# Altium PCB Energetski_deo_ploce.PcbDoc (part 1 of 2)
Units mm, origin at the board's own origin, x right, y up, seen from the top; angles counter-clockwise.
Board outline 196.98 x 121.92 mm, 4 copper layers (Energetika, Napajanje 2, Mikroprocesor, Zemlja), stack 1.961 mm thick; 114 components, 87 nets, 356 pads, 23 vias.
Unrouted connection lines stored in the file: 4.
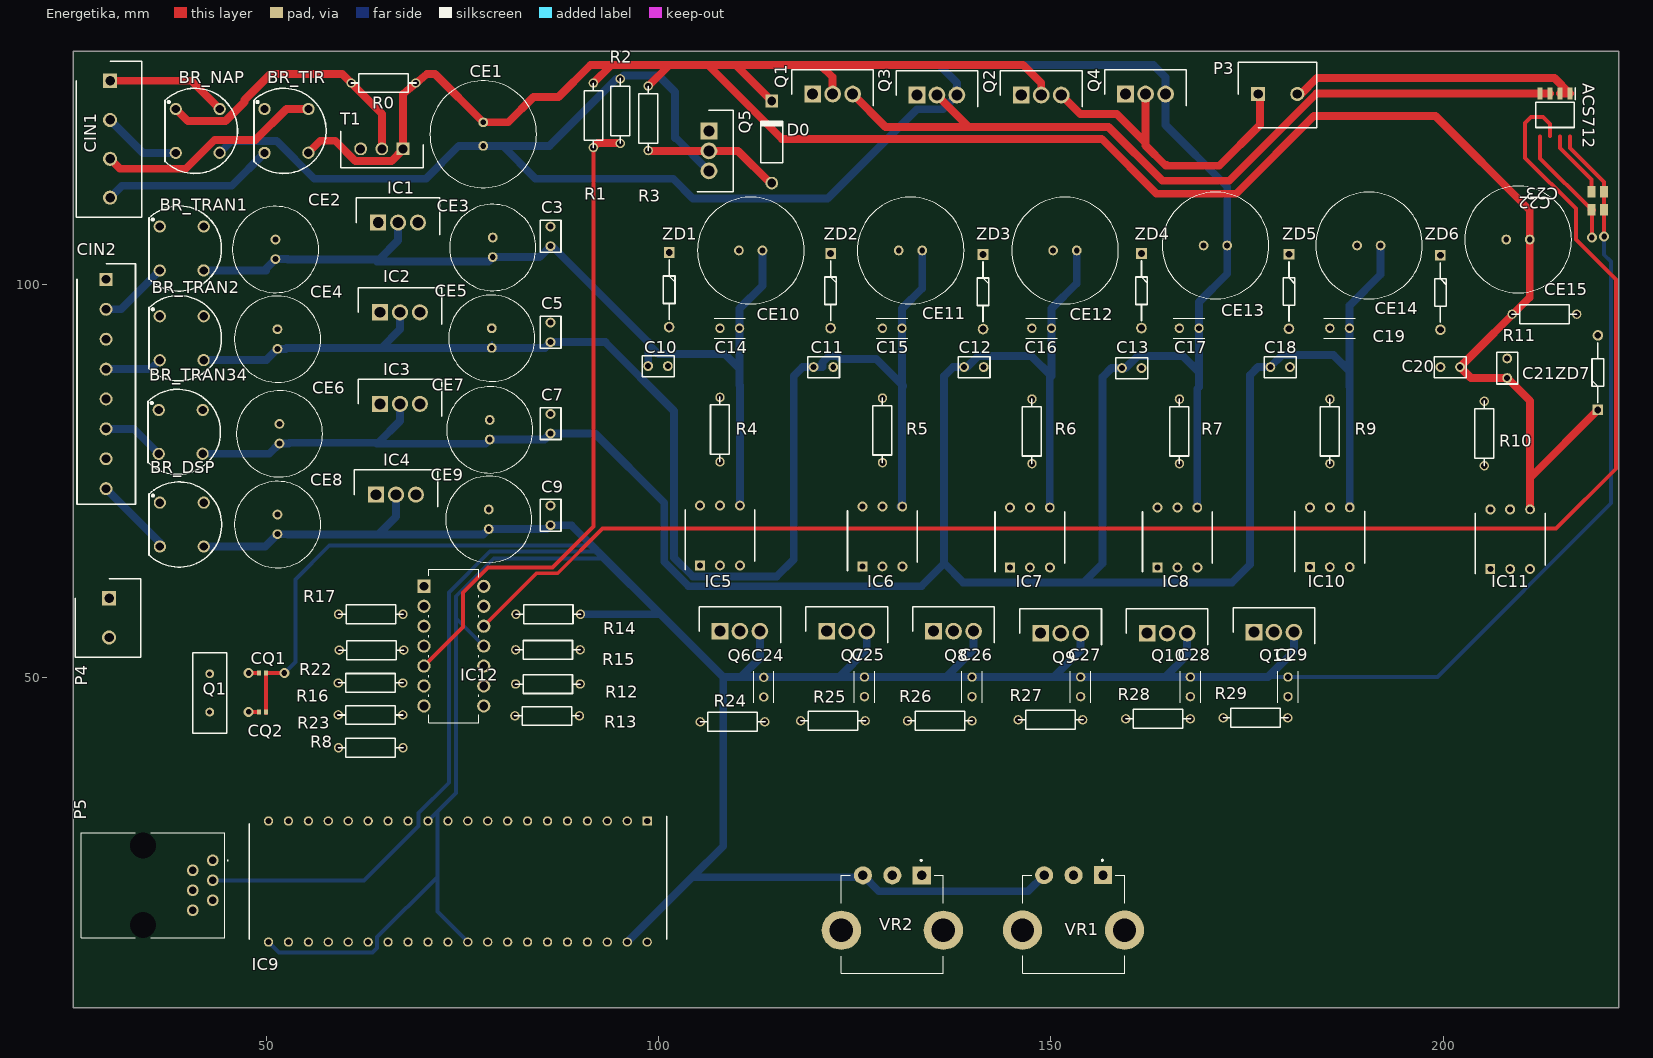
[diagram p0: Energetika view]
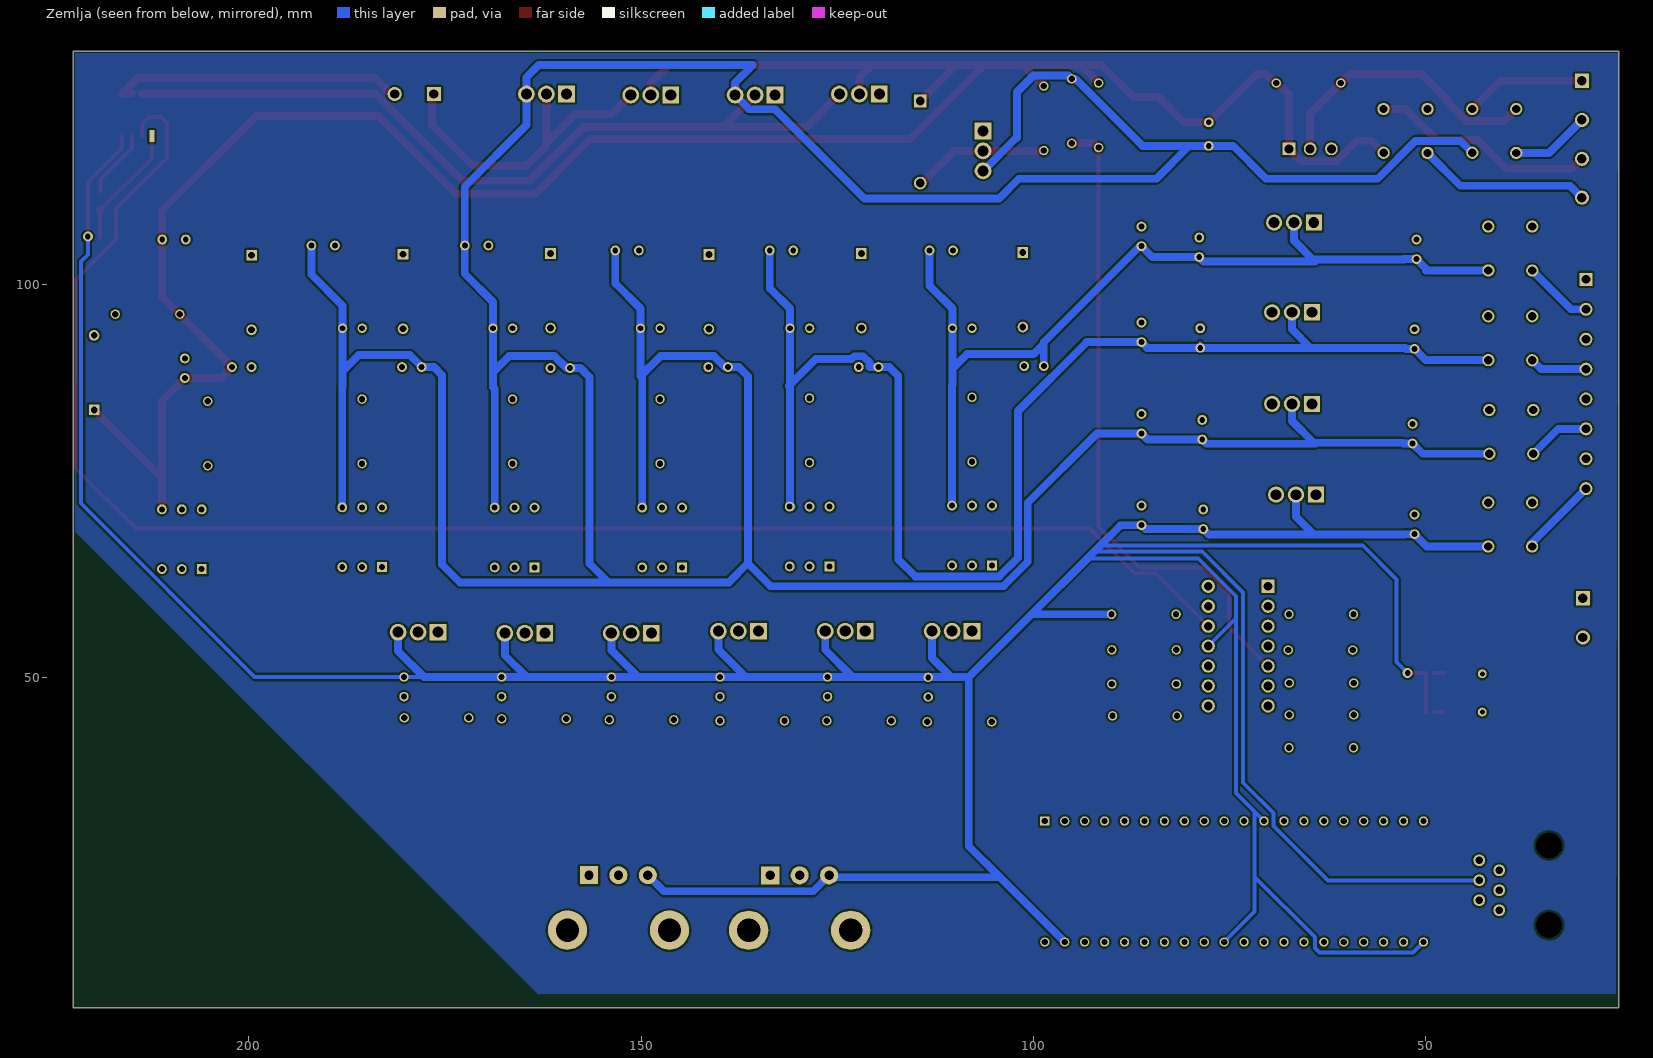
[diagram p1: Zemlja view, seen from below]
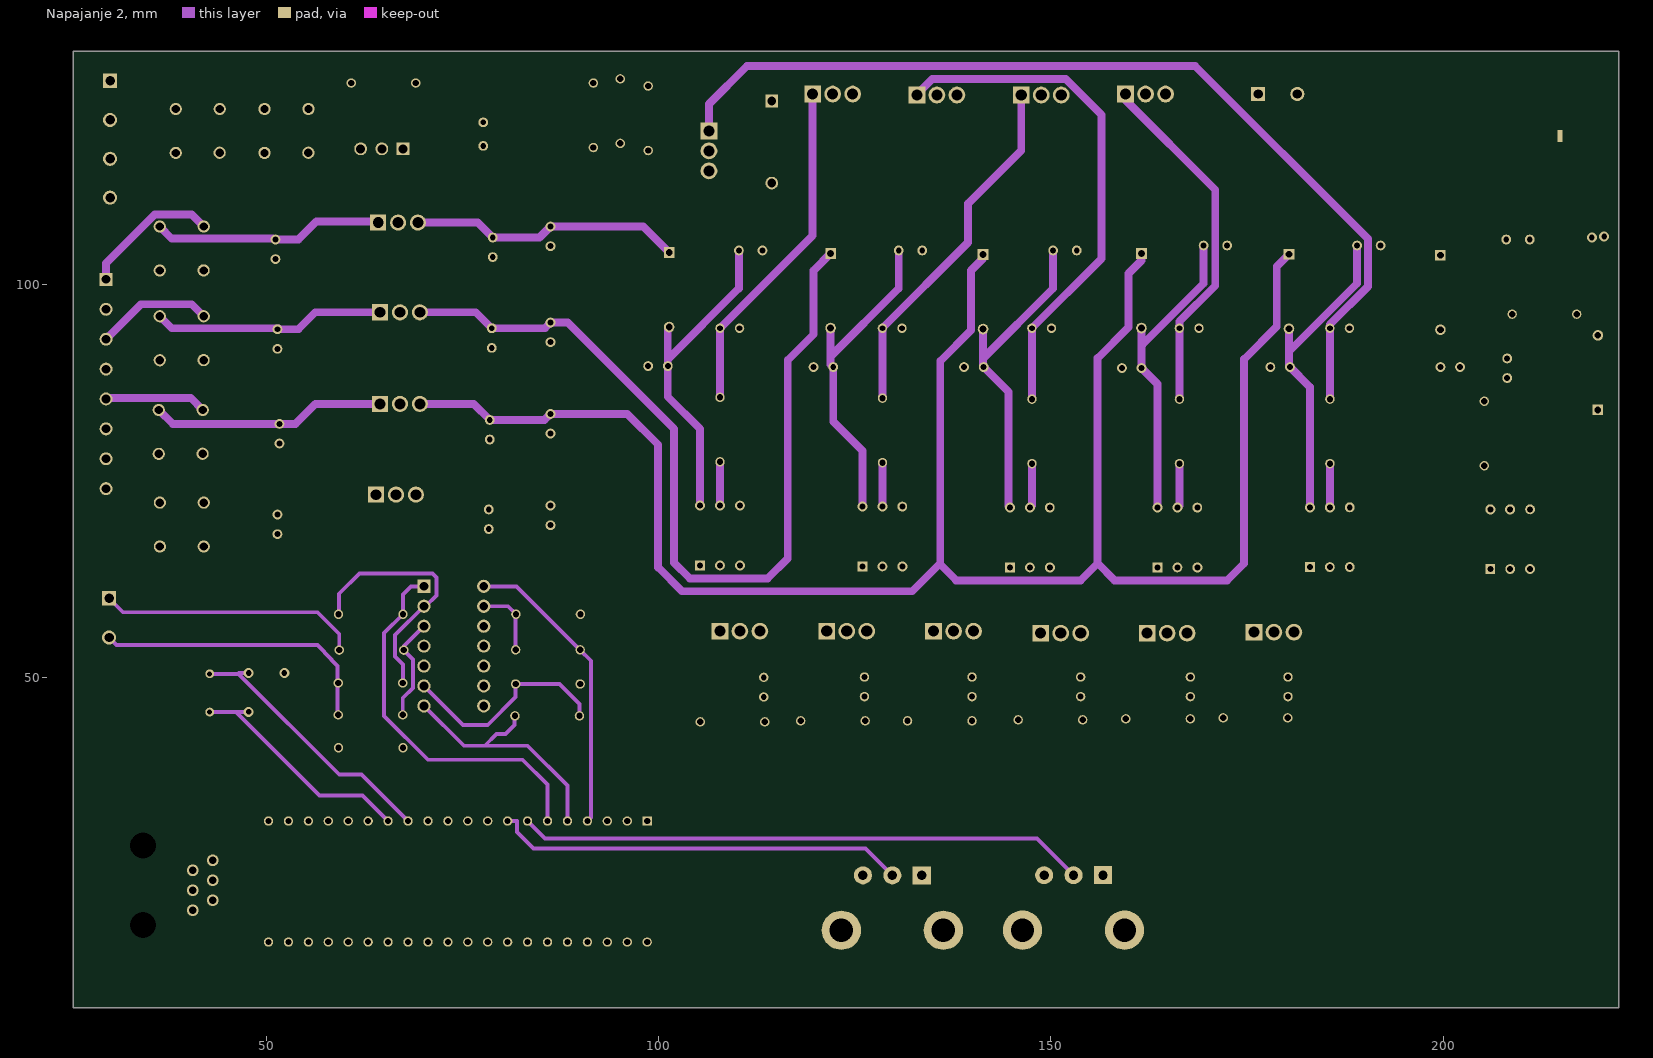
[diagram p2: Napajanje 2]
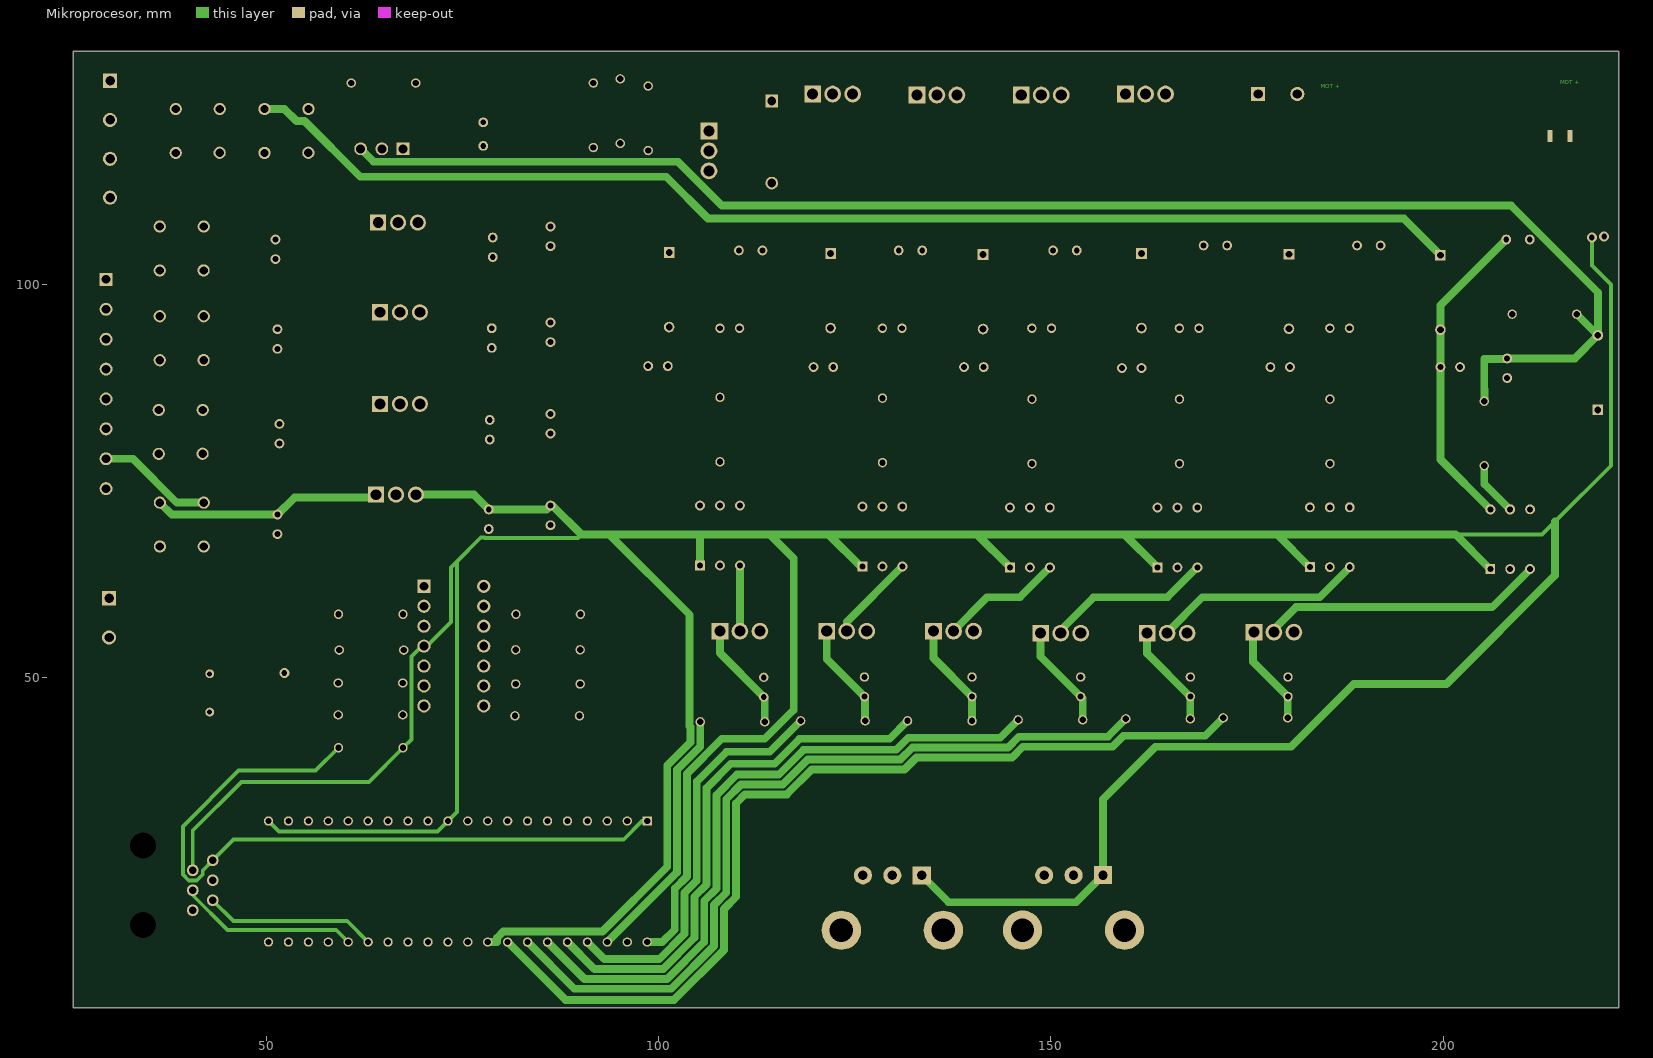
[diagram p3: Mikroprocesor]

## Layer stack, top to bottom
Top Solder: solder mask 0.0102, Solder Resist, Dk 3.5
Energetika: signal copper 0.0356
Dielectric 1: core 0.254, FR-4, Dk 4.2
Napajanje 2: signal copper 0.036
Dielectric 3: prepreg 0.127, Dk 4.2
Mikroprocesor: signal copper 1
Dielectric 2: core 0.254, Dk 4.2
Zemlja: signal copper 0.254
Bottom Solder: solder mask 0.0102, Solder Resist, Dk 3.5

## Board outline
25.4,129.794 25.4,7.874 222.377,7.874 222.377,129.794

## Design rules (kind name [scope] priority, off if disabled: settings)
Clearance [All] p1: gap=0.254 ignorepadtopadclearanceinfootprint=FALSE except(0: Arc-Hole Track-Hole SMDPad-Hole THPad-Hole Via-Hole Fill-Hole Poly-Hole Region-Hole Text-Hole)
PlaneClearance [All] p1: clearance=1
PolygonConnect [InNet('GND')] p1: connectstyle=Relief reliefconductorwidth=1 reliefentries=4 polygonreliefangle="90 Angle" airgapwidth=1
RoutingVias [All] p1: holewidth=0.711 width=1.27 viastyle="Through Hole" minholewidth=0.711 minwidth=1 maxholewidth=0.711 maxwidth=1.27
SolderMaskExpansion [All] p1: expansion=0.102
Width [All] p1: maxlimit=2 minlimit=0.254 preferedwidth=1 minimp=50.000000 maximp=50.000000 favimp=50.000000
29 further rules are at their usual default settings.

## Classes and differential pairs
component class "Upravljacki deo": ACS712 C10 C11 C12 C13 C14 C15 C16 C17 C18 C19 C20 C21 C22 C23 C24 C25 C26 C27 C28 C29 CE10 CE11 CE12 CE13 CE14 CE15 CQ1 CQ2 IC5 IC6 IC7 IC8 IC9 IC10 IC11 IC12 P3 P4 P5 Q1 Q6 Q7 Q8 Q9 Q10 Q11 R4 R5 R6 R7 R8 R9 R10 R11 R12 R13 R14 R15 R16 R17 R22 R23 R24 R25 R26 R27 R28 R29 VR1 VR2 ZD1 ZD2 ZD3 ZD4 ZD5 ZD6 ZD7
component class Napajanje_1: BR_DSP BR_NAP BR_TIR BR_TRAN1 BR_TRAN2 BR_TRAN34 C3 C5 C7 C9 CE1 CE2 CE3 CE4 CE5 CE6 CE7 CE8 CE9 CIN1 CIN2 D0 IC1 IC2 IC3 IC4 Q1 Q2 Q3 Q4 Q5 R0 R1 R2 R3 T1

## Components (designator, comment, footprint, x,y, rotation, side; value= is the part's Value field where it differs from the comment)
ACS712 "Current sensor" SOIC127P600X175-8N 214.249,121.666 r270 top
BR_DSP "W04G-E4/51GI-ND" "BRIGE RECTIFIER" 36.449,72.263 r270 top
BR_NAP "W04G-E4/51GI-ND" "BRIGE RECTIFIER" 38.481,122.428 r270 top
BR_TIR "W04G-E4/51GI-ND" "BRIGE RECTIFIER" 49.784,122.428 r270 top
BR_TRAN1 "W04G-E4/51GI-ND" "BRIGE RECTIFIER" 36.437,107.442 r270 top
BR_TRAN2 "W04G-E4/51GI-ND" "BRIGE RECTIFIER" 36.437,96.012 r270 top
BR_TRAN34 "W04G-E4/51GI-ND" "BRIGE RECTIFIER" 36.31,84.074 r270 top
C3 "BC1160TR-ND" "CAP4, 0.1uF, 50V" 86.233,104.942 r90 top value=0.1uF
C5 "BC1160TR-ND" "CAP4, 0.1uF, 50V" 86.233,92.71 r90 top value=0.1uF
C7 "BC1160TR-ND" "CAP4, 0.1uF, 50V" 86.233,81.066 r90 top value=0.1uF
C9 "BC1160TR-ND" "CAP4, 0.1uF, 50V" 86.233,69.382 r90 top value=0.1uF
C10 "BC1160TR-ND" "CAP4, 0.1uF, 50V" 98.679,89.662 r0 top value=0.1uF
C11 "BC1160TR-ND" "CAP4, 0.1uF, 50V" 119.761,89.535 r0 top value=0.1uF
C12 "BC1160TR-ND" "CAP4, 0.1uF, 50V" 138.938,89.535 r0 top value=0.1uF
C13 "BC1160TR-ND" "CAP4, 0.1uF, 50V" 159.044,89.408 r0 top value=0.1uF
C14 "BC5223TB-ND" "CAP6, 100pF, 50V" 107.823,94.488 r0 top value=100pF
C15 "BC5223TB-ND" "CAP6, 100pF, 50V" 128.524,94.488 r0 top value=100pF
C16 "BC5223TB-ND" "CAP6, 100pF, 50V" 147.574,94.488 r0 top value=100pF
C17 "BC5223TB-ND" "CAP6, 100pF, 50V" 166.37,94.488 r0 top value=100pF
C18 "BC1160TR-ND" "CAP4, 0.1uF, 50V" 177.967,89.535 r0 top value=0.1uF
C19 "BC5223TB-ND" "CAP6, 100pF, 50V" 185.547,94.488 r0 top value=100pF
C20 "BC1160TR-ND" "CAP4, 0.1uF, 50V" 202.144,89.535 r180 top value=0.1uF
C21 "BC1160TR-ND" "CAP4, 0.1uF, 50V" 208.153,88.138 r90 top value=0.1uF
C22 "C0805C104K9RACTU" "CAP10, 0.1uF, 6.4V" 219.71,109.601 r0 top
C23 "C1206Y102K9RAC7800" "CAP9, 1000pF, 6.3V" 219.71,111.887 r0 top
C24 "BC5223TB-ND" "CAP6, 100pF, 50V" 113.411,47.498 r90 top value=100pF
C25 "BC5223TB-ND" "CAP6, 100pF, 50V" 126.238,47.538 r90 top value=100pF
C26 "BC5223TB-ND" "CAP6, 100pF, 50V" 139.954,47.538 r90 top value=100pF
C27 "BC5223TB-ND" "CAP6, 100pF, 50V" 153.797,47.538 r90 top value=100pF
C28 "BC5223TB-ND" "CAP6, 100pF, 50V" 167.767,47.538 r90 top value=100pF
C29 "BC5223TB-ND" "CAP6, 100pF, 50V" 180.213,47.538 r90 top value=100pF
CE1 "399-6104-ND" "CAP2 100uF, 35V - duplicate" 77.66,120.729 r270 top value=100uF
CE2 "399-6575-ND" "CAP1 33uF, 35V" 51.181,105.791 r270 top value=33µF
CE3 "399-6575-ND" "CAP1 33uF, 35V" 78.867,106.045 r270 top value=33µF
CE4 "399-6575-ND" "CAP1 33uF, 35V" 51.435,94.361 r270 top value=33µF
CE5 "399-6575-ND" "CAP1 33uF, 35V" 78.74,94.488 r270 top value=33µF
CE6 "399-6575-ND" "CAP1 33uF, 35V" 51.689,82.296 r270 top value=33µF
CE7 "399-6575-ND" "CAP1 33uF, 35V" 78.486,82.804 r270 top value=33µF
CE8 "399-6575-ND" "CAP1 33uF, 35V" 51.435,70.739 r270 top value=33µF
CE9 "399-6575-ND" "CAP1 33uF, 35V" 78.359,71.394 r270 top value=33µF
CE10 "TE1157-E3-ND" "CAP8, 20uF, 16V" 110.236,104.394 r0 top value=20µF
CE11 "TE1157-E3-ND" "CAP8, 20uF, 16V" 130.604,104.394 r0 top value=20µF
CE12 "TE1157-E3-ND" "CAP8, 20uF, 16V" 150.289,104.394 r0 top value=20µF
CE13 "TE1157-E3-ND" "CAP8, 20uF, 16V" 169.466,105.029 r0 top value=20µF
CE14 "TE1157-E3-ND" "CAP8, 20uF, 16V" 189.024,105.029 r0 top value=20µF
CE15 "TE1157-E3-ND" "CAP8, 20uF, 16V" 208.026,105.791 r0 top value=20µF
CIN1 "Header" "HEADER 4 PIN" 30.099,126.031 r270 top
CIN2 "" "HEADER 8 PIN" 29.591,100.711 r270 top
CQ1 "22p" CAPC1005X56N 49.53,50.546 r180 top
CQ2 "22p" CAPC1005X56N 49.53,45.593 r180 top
D0 "UF4007TR-ND" "DIODE, 1000V, 1A" 114.427,112.984 r90 top
IC1 "512-LM7812ACT" "LM7812ACT, 1A" 64.267,107.95 r0 top
IC2 "512-LM7812ACT" "LM7812ACT, 1A" 64.516,96.52 r0 top
IC3 "512-LM7812ACT" "LM7812ACT, 1A" 64.516,84.836 r0 top
IC4 "LM7805ACT" "LM7805ACT, 1A" 64.008,73.279 r0 top
IC5 "TLP701H(TP,F)" "OPTOISO, 30V, 60mA" 105.283,64.262 r90 top
IC6 "TLP701H(TP,F)" "OPTOISO, 30V, 60mA" 125.984,64.135 r90 top
IC7 "TLP701H(TP,F)" "OPTOISO, 30V, 60mA" 144.78,64.008 r90 top
IC8 "TLP701H(TP,F)" "OPTOISO, 30V, 60mA" 163.576,64.008 r90 top
IC9 "DSPIC30F4011-30I/P" DIP1543W58P254L5175H635Q40N 74.422,23.971 r270 top
IC10 "TLP701H(TP,F)" "OPTOISO, 30V, 60mA" 183.007,64.041 r90 top
IC11 "TLP701H(TP,F)" "OPTOISO, 30V, 60mA" 205.994,63.787 r90 top
IC12 "*" 4xOPAMP_DIP254P762X508-14 77.724,46.355 r0 top
P3 "Connector 2" "HEADER 2 PIN" 176.403,124.333 r0 top
P4 "Connector 2" "HEADER 2 PIN" 29.972,60.071 r270 top
P5 "MPLAB_con" "MPLAB CONNECTOR" 34.29,23.495 r270 top
Q1 "*" HC-49-4H 42.799,48.006 r90 top
Q1 "STP7NK40ZFP" "MOSFET 400V, 5.4A" 119.634,124.333 r0 top
Q2 "STP7NK40ZFP" "MOSFET 400V, 5.4A" 146.219,124.206 r0 top
Q3 "STP7NK40ZFP" "MOSFET 400V, 5.4A" 132.927,124.206 r0 top
Q4 "STP7NK40ZFP" "MOSFET 400V, 5.4A" 159.512,124.333 r0 top
Q5 "STP7NK40ZFP" "MOSFET 400V, 5.4A" 106.426,119.634 r270 top
Q6 "STP7NK40ZFP" "MOSFET 400V, 5.4A" 107.823,55.88 r0 top
Q7 "STP7NK40ZFP" "MOSFET 400V, 5.4A" 121.433,55.88 r0 top
Q8 "STP7NK40ZFP" "MOSFET 400V, 5.4A" 135.044,55.88 r0 top
Q9 "STP7NK40ZFP" "MOSFET 400V, 5.4A" 148.697,55.626 r0 top
Q10 "STP7NK40ZFP" "MOSFET 400V, 5.4A" 162.265,55.626 r0 top
Q11 "STP7NK40ZFP" "MOSFET 400V, 5.4A" 175.875,55.753 r0 top
R0 "140XBK-ND" "RES5, 140R, 0.25W - duplicate" 72.907,125.741 r180 top value=140R
R1 "270QBK-ND" "RES2, 2K4, 0.25W - duplicate" 91.705,113.656 r90 top value=2K4
R2 "270QBK-ND" "RES1, 240R, 0.25W" 95.112,130.116 r270 top value=240R
R3 "270QBK-ND" "RES2, 2K4, 0.25W - duplicate" 98.69,113.275 r90 top value=2K4
R4 "47QBK-ND" "RES3, 47R, 0.25W - duplicate" 107.823,89.535 r270 top value="47 Ohm"
R5 "47QBK-ND" "RES3, 47R, 0.25W - duplicate" 128.524,89.433 r270 top value="47 Ohm"
R6 "47QBK-ND" "RES3, 47R, 0.25W - duplicate" 147.574,89.306 r270 top value="47 Ohm"
R7 "47QBK-ND" "RES3, 47R, 0.25W - duplicate" 166.37,89.306 r270 top value="47 Ohm"
R8 "47KQTR-ND" "RES3, 47R, 0.25W - duplicate" 55.363,41.01 r0 top value=47K
R9 "47QBK-ND" "RES3, 47R, 0.25W - duplicate" 185.547,89.306 r270 top value="47 Ohm"
R10 "470QTR-ND" "RES3, 47R, 0.25W - duplicate" 205.221,89.036 r270 top
R11 "CFR-25JR-52-3K3" "RES6, 3K3, 0.25W - duplicate" 204.932,96.266 r0 top value=3k3
R12 "CFR-25JR-52-10K" "RES4, 10K, 0.25W - duplicate" 77.935,49.138 r0 top
R13 "CFR-25JR-52-10K" "RES4, 10K, 0.25W - duplicate" 77.842,45.074 r0 top
R14 "CFR-25JR-52-10K" "RES4, 10K, 0.25W - duplicate" 93.896,58.05 r180 top
R15 "CFR-25JR-52-10K" "RES4, 10K, 0.25W - duplicate" 77.935,53.49 r0 top
R16 "CFR-25JR-52-10K" "RES4, 10K, 0.25W - duplicate" 71.256,49.287 r180 top
R17 "CFR-25JR-52-10K" "RES4, 10K, 0.25W - duplicate" 71.29,58.05 r180 top
R22 "24KQBK-ND" "RES2, 2K4, 0.25W - duplicate" 55.456,53.456 r0 top
R23 "2.4KQBK-ND" "RES1, 240R, 0.25W" 55.329,45.201 r0 top
R24 "47QBK-ND" "RES3, 47R, 0.25W - duplicate" 117.391,44.334 r180 top value="47 Ohm"
R25 "47QBK-ND" "RES3, 47R, 0.25W - duplicate" 130.184,44.461 r180 top value="47 Ohm"
R26 "47QBK-ND" "RES3, 47R, 0.25W - duplicate" 143.807,44.461 r180 top value="47 Ohm"
R27 "47QBK-ND" "RES3, 47R, 0.25W - duplicate" 157.904,44.588 r180 top value="47 Ohm"
R28 "47QBK-ND" "RES3, 47R, 0.25W - duplicate" 171.62,44.715 r180 top value="47 Ohm"
R29 "47QBK-ND" "RES3, 47R, 0.25W - duplicate" 184.032,44.842 r180 top value="47 Ohm"
T1 "Thyristor1" "THYRISTOR 400V, 8A" 67.437,117.348 r180 top
VR1 "PTV09A-1220F-B103" PTV09A1220FB103 152.885,24.78 r180 top
VR2 "PTV09A-1220F-B103" PTV09A1220FB103 129.794,24.765 r180 top
ZD1 "BZX55C12-TAPGICT-ND" "ZENER DIODE, 12V, 200mA, 500mW" 101.346,104.14 r270 top
ZD2 "BZX55C12-TAPGICT-ND" "ZENER DIODE, 12V, 200mA, 500mW" 121.92,104.013 r270 top
ZD3 "BZX55C12-TAPGICT-ND" "ZENER DIODE, 12V, 200mA, 500mW" 141.351,103.886 r270 top
ZD4 "BZX55C12-TAPGICT-ND" "ZENER DIODE, 12V, 200mA, 500mW" 161.544,104.013 r270 top
ZD5 "BZX55C12-TAPGICT-ND" "ZENER DIODE, 12V, 200mA, 500mW" 180.34,103.919 r270 top
ZD6 "BZX55C12-TAPGICT-ND" "ZENER DIODE, 12V, 200mA, 500mW" 199.644,103.792 r270 top
ZD7 "BZX55C12-TAPGICT-ND" "ZENER DIODE, 12V, 200mA, 500mW" 219.71,84.074 r90 top

## Footprints (in the part's own frame and the unit in brackets; to place one, negate y for a bottom-side part, rotate by r counter-clockwise, add the part's x,y. Pads: shape width x height; smd on the part's side, far side on the other; paste and mask are expansions set on the pad)
4xOPAMP_DIP254P762X508-14 [mil]
  rect 66x66 hole 44: 1(-300,600)
  round 66 hole 44: 2(-300,500) 3(-300,400) 4(-300,300) 5(-300,200) 6(-300,100) 7(-300,0) 8(0,0) 9(0,100) 10(0,200) 11(0,300) 12(0,400) 13(0,500) 14(0,600)
  silkscreen extent -275,-85 -25,685
"BRIGE RECTIFIER" [mm] "Max dia = 0.81mm"
  oval 1.56x1.55 hole 1.06: 1(0,0)
  round 1.56 hole 1.06: 2(5.6,0) 3(5.588,5.588) 4(0,5.6)
  silkscreen extent -2.63,-1.37 8.22,7.86
"CAP1 33uF, 35V" [mm] "Thru-Hole;"
  round 1.25 hole 0.75: 1(0,0) 2(2.5,0)
  silkscreen extent -4.23,-5.5 6.77,5.5
"CAP2 100uF, 35V - duplicate" [mm] "Thru-Hole;"
  round 1.25 hole 0.75: 1(0,0) 2(3,0)
  silkscreen extent -5.27,-6.8 8.32,6.8
"CAP4, 0.1uF, 50V" [mm] "Radial Cap, Thru-Hole; 2 Leads; 0.3 in Pin Spacing"
  round 1.258 hole 0.758: 1(0,0) 2(2.5,0)
  silkscreen extent -0.76,-1.33 3.3,1.33
"CAP6, 100pF, 50V" [mm]
  round 1.2 hole 0.75: 1(0,0) 2(2.5,0)
  silkscreen extent -0.75,-1.3 3.25,1.3, body extent -0.75,-1.3 3.25,1.3, height 5.7
"CAP8, 20uF, 16V" [mm] "Thru-Hole;"
  round 1.25 hole 0.75: 1(0,0) 2(3,0)
  silkscreen extent -5.28,-6.8 8.32,6.8
"CAP9, 1000pF, 6.3V" [mm]
  rect 1.02x1.47 smd: 1(-0.8,0) 2(0.8,0)
  body extent -1,-0.63 1,0.63, height 0.88
"CAP10, 0.1uF, 6.4V" [mm]
  rect 1.02x1.47 smd: 1(-0.8,0) 2(0.8,0)
  body extent -1,-0.63 1,0.63, height 0.88
CAPC1005X56N [mm]
  rect 0.5x0.65 smd: 1(-0.45,0) 2(0.45,0)
  body extent -0.5,-0.25 0.5,0.25, height 0.56
"DIODE, 1000V, 1A" [mm] "Through Hole"
  round 1.61 hole 1.11: 1(0,0)
  rect 1.61x1.61 hole 1.11: 2(10.46,0)
  silkscreen extent 2.58,-1.4 7.99,1.4
DIP1543W58P254L5175H635Q40N [mm]
  rect 1.184x1.184 hole 0.784: 1(-7.715,24.13)
  round 1.184 hole 0.784: 2(-7.715,21.59) 3(-7.715,19.05) 4(-7.715,16.51) 5(-7.715,13.97) 6(-7.715,11.43) 7(-7.715,8.89) 8(-7.715,6.35) 9(-7.715,3.81) 10(-7.715,1.27) 11(-7.715,-1.27) 12(-7.715,-3.81) 13(-7.715,-6.35) 14(-7.715,-8.89) 15(-7.715,-11.43) 16(-7.715,-13.97) 17(-7.715,-16.51) 18(-7.715,-19.05) 19(-7.715,-21.59) 20(-7.715,-24.13) 21(7.715,-24.13) 22(7.715,-21.59) 23(7.715,-19.05) 24(7.715,-16.51) 25(7.715,-13.97) 26(7.715,-11.43) 27(7.715,-8.89) 28(7.715,-6.35) 29(7.715,-3.81) 30(7.715,-1.27) 31(7.715,1.27) 32(7.715,3.81) 33(7.715,6.35) 34(7.715,8.89) 35(7.715,11.43) 36(7.715,13.97) 37(7.715,16.51) 38(7.715,19.05) 39(7.715,21.59) 40(7.715,24.13)
  silkscreen extent -8.31,-26.61 7.37,26.61, body extent -7.86,-25.88 7.86,25.88, height 6.35
HC-49-4H [mm]
  round 1.13 hole 0.63: 1(-2.44,0) 2(2.44,0)
  silkscreen extent -5.13,-2.17 5.13,2.17
"HEADER 2 PIN" [mm]
  rect 1.8x1.8 hole 1.2: 1(0,0)
  round 1.8 hole 1.2: 2(5,0)
  silkscreen extent -2.5,-4.3 7.5,4.05
"HEADER 4 PIN" [mm]
  rect 1.8x1.8 hole 1.2: 1(0,0)
  round 1.8 hole 1.2: 2(5,0) 3(9.953,0) 4(14.906,0)
  silkscreen extent -2.5,-4.32 17.41,4.05
"HEADER 8 PIN" [mm]
  rect 1.65x1.65 hole 1.1: 1(0,0)
  round 1.65 hole 1.1: 2(3.81,0) 3(7.62,0) 4(11.43,0) 5(15.24,0) 6(19.05,0) 7(22.86,0) 8(26.67,0)
  silkscreen extent -2,-3.7 28.67,3.75
"LM7805ACT, 1A" [mm]
  rect 2.055x2.055 hole 1.37: 1(0,0)
  round 2.055 hole 1.37: 2(2.535,0) 3(5.07,0)
  silkscreen extent -2.8,-1.55 7.87,3.15, body extent -2.55,-1.55 7.61,3.15, height 18.54
"LM7812ACT, 1A" [mm]
  rect 2.055x2.055 hole 1.37: 1(0,0)
  round 2.055 hole 1.37: 2(2.535,0) 3(5.07,0)
  silkscreen extent -2.8,-1.55 7.87,3.15, body extent -2.55,-1.55 7.61,3.15, height 18.54
"MOSFET 400V, 5.4A" [mm]
  rect 2.13x2.13 hole 1.42: 1(0,0)
  round 2.13 hole 1.42: 2(2.55,0) 3(5.1,0)
  silkscreen extent -2.65,-1.5 7.75,3.1, body extent -2.55,-1.5 7.65,3.1, height 19.4
"MPLAB CONNECTOR" [mm]
  round 1.493 hole 0.96: 1(-3.175,8.89) 2(-1.905,6.35) 3(-0.635,8.89) 4(0.635,6.35) 5(1.905,8.89) 6(3.175,6.35)
  round 1.665 hole 3.33 unplated: 7(-5.08,0) 8(5.08,0)
  silkscreen extent -6.71,-7.87 6.71,10.85, body extent -6.71,-7.87 6.71,10.42, height 12.1
"OPTOISO, 30V, 60mA" [mm]
  rect 1.26x1.26 hole 0.76: 1(0,0)
  round 1.26 hole 0.76: 2(0,-2.54) 3(0,-5.08) 4(7.62,-5.08) 5(7.62,-2.54) 6(7.62,0)
  silkscreen extent -0.56,-6.98 7.11,1.91, body extent -0.13,-6.8 7.75,1.72, height 5.08
PTV09A1220FB103 [mm]
  rect 2.3x2.3 hole 1.2: 1(-3.75,0)
  round 2.3 hole 1.2: 2(0,0) 3(3.75,0)
  round 5 hole 2.973: MH1(-6.5,7) MH2(6.5,7)
  silkscreen extent -6.5,-2 6.5,12.5
"RES1, 240R, 0.25W" [mm]
  round 1.2 hole 0.8: 1(3.853,0.011) 2(12.074,0.011)
  silkscreen extent 3.8,-1.2 12.07,1.2
"RES2, 2K4, 0.25W - duplicate" [mm]
  round 1.2 hole 0.8: 1(3.853,0.011) 2(12.074,0.011)
  silkscreen extent 3.8,-1.2 12.07,1.2
"RES3, 47R, 0.25W - duplicate" [mm]
  round 1.2 hole 0.8: 1(3.853,0.011) 2(12.074,0.011)
  silkscreen extent 3.8,-1.2 12.07,1.2
"RES4, 10K, 0.25W - duplicate" [mm]
  round 1.2 hole 0.8: 1(3.853,0.011) 2(12.074,0.011)
  silkscreen extent 3.8,-1.2 12.07,1.2
"RES5, 140R, 0.25W - duplicate" [mm]
  round 1.2 hole 0.8: 1(3.853,0.011) 2(12.074,0.011)
  silkscreen extent 3.8,-1.2 12.07,1.2
"RES6, 3K3, 0.25W - duplicate" [mm]
  round 1.2 hole 0.8: 1(3.853,0.011) 2(12.074,0.011)
  silkscreen extent 3.8,-1.2 12.07,1.2
SOIC127P600X175-8N [mm]
  rect 1.525x0.65 smd: 1(-2.712,1.905) 2(-2.712,0.635) 3(-2.712,-0.635) 4(-2.712,-1.905)
  rect 1.525x0.65 smd far side: 5(2.712,-1.905)
  rect 1.525x0.65 on Mid2: 6(2.712,-0.635) 8(2.712,1.905)
  rect 1.525x0.65 on Mid1: 7(2.712,0.635)
  silkscreen extent -3.47,-2.45 1.6,2.58, body extent -3,-2.45 3,2.45, height 1.75
"THYRISTOR 400V, 8A" [mm]
  rect 1.63x1.63 hole 1.13: 1(0,0)
  round 1.63 hole 1.13: 2(2.7,0) 3(5.4,0)
  silkscreen extent -2.59,-2.24 7.92,2.41, body extent -2.49,-2.24 7.82,2.41, height 18.67
"ZENER DIODE, 12V, 200mA, 500mW" [mm]
  rect 1.35x1.35 hole 0.85: 1(0,0)
  round 1.35 hole 0.85: 2(9.5,0)
  silkscreen extent 0.95,-0.75 8.55,0.75, body extent -0.3,-0.85 9.8,0.85, height 1.69

## Part data
ACS712: "ACS712ELCTR-05B-T", Manufacturer_Name="Allegro Microsystems", RS Part Number=6807131P, Allied_Number=R1076681, Allied Price/Stock=http://www.alliedelec.com/allegro-microsystems-acs712elctr-05b-t/R1076681/, Datasheet link=http://docs-emea.rs-online.com/webdocs/0d88/0900766b80d885f5.pdf, Height=1.75mm, Manufacturer_Part_Number=ACS712ELCTR-05B-T, RS Price/Stock=http://uk.rs-online.com/web/p/products/6807131P
BR_DSP BR_NAP BR_TIR BR_TRAN1 BR_TRAN2 BR_TRAN34: library part "Bridge rectifier", "1 Phase, 400V, 1.5A", Manufacturer Part Number=W04G-E4/51, Datasheet link=http://www.vishay.com/docs/88769/woo5g.pdf, Detailed Description="Bridge Rectifier Single Phase Standard 400V Through Hole WOG", Digi-Key Part Number=W04G-E4/51GI-ND
C3 C5 C7 C9 C10 C11 C12 C13 C18 C20 C21: library part Cap4, "CER 0.1uF, 50V", Manufacturer="Vishay BC Components", Manufacturer Part Number=K104Z15Y5VF5TL2, Datasheet=http://www.vishay.com/docs/45171/kseries.pdf, Detailed Description="0.1µF -20%, +80% 50V Ceramic Capacitor Y5V (F) Radial", Digi-Key Part Number=BC1160TR-ND
C14 C15 C16 C17 C19 C24 C25 C26 C27 C28 C29: library part Cap6, "CER, 100pF, 50V", Manufacturer="Vishay BC Components", Manufacturer Part Number=K101J10C0GF5UH5, Datasheets=http://www.vishay.com/docs/45171/kseries.pdf, Detailed Description="100pF ±5% 50V Ceramic Capacitor C0G, NP0 Radial", Digi-Key Part Number=BC5223TB-ND
C22: library part Cap10, "CER 0.1uF, 6.3V", Manufacturer_Name=Kemet, Mouser Part Number=80-C0805C104K9R, Arrow Part Number=C0805C104K9RACTU, Arrow Price/Stock=https://www.arrow.com/en/products/c0805c104k9ractu/kemet-corporation, Datasheet link=https://content.kemet.com/datasheets/KEM_C1002_X7R_SMD.pdf, Height=0.88mm, Manufacturer_Part_Number=C0805C104K9RACTU, Mouser Price/Stock=https://www.mouser.co.uk/ProductDetail/KEMET/C0805C104K9RACTU?qs=jbCUrP3sAgRYLjBU7s5h8Q%3D%3D
C23: library part Cap9, "CER 1000pF, 6.3V", Manufacturer_Name=Kemet, Manufacturer_Part_Number=C1206Y102K9RACTU, Mouser Part Number=80-C1206Y102K9R, Datasheet link=https://content.kemet.com/datasheets/KEM_C1015_X7R_FF-CAP_SMD.pdf, Detailed Description="Multilayer Ceramic Capacitors MLCC - SMD/SMT 6.3V 1000pF X7R 1206 10%"
CE1: library part Cap2, "ALU 100uF, 35V", Manufacturer=KEMET, Manufacturer Part Number=ESK107M035AE3AA, Datasheet link=https://api.kemet.com/component-edge/download/specsheet/ESK107M035AE3AA.pdf, Digi-Key Part Number=399-6104-ND
CE2 CE3 CE4 CE5 CE6 CE7 CE8 CE9: library part Cap1, "ALU 33uF, 35V", Manufacturer=KEMET, Manufacturer Part Number=ESH336M035AC3AA, Datasheet=https://content.kemet.com/datasheets/KEM_A4005_ESH.pdf, Detailed Description="33µF 35V Aluminum Electrolytic Capacitors Radial, Can  2000 Hrs @ 105°C", Digi-Key Part Number=399-6575-ND
CE10 CE11 CE12 CE13 CE14 CE15: library part Cap8, "ALU 20uF, 16V", Manufacturer="Vishay Sprague", Manufacturer Part Number=TE1157-E3, Datasheet=http://www.vishay.com/docs/42042/te.pdf, Detailed Description="20µF 16V Aluminum Electrolytic Capacitors Axial, Can  2000 Hrs @ 85°C", Digi-Key Part Number=TE1157-E3-ND
CIN1: library part "Header 4", "Header, 4-Pin", Digi-Key Part Number=A136029-ND, Manufacturer="TE Connectivity AMP Connectors", Manufacturer Part Number=3-282836-2, Datasheet link=https://www.te.com/commerce/DocumentDelivery/DDEController?Action=srchrtrv&DocNm=282836&DocType=Customer+Drawing&DocLang=English, Detailed Description="4 Position Wire to Board Terminal Block Horizontal with Board 0.197\" (5.00mm) Through Hole"
CIN2: library part "Connector 8", "Header, 8-Pin", Digi-Key Part Number=277-1953-ND, Manufacturer="Phoenix Contact", Manufacturer Part Number=1727078, Datasheet link=https://media.digikey.com/pdf/Data%20Sheets/Phoenix%20Contact%20PDFs/1727078.pdf, Detailed Description="8 Position Wire to Board Terminal Block Horizontal with Board 0.150\" (3.81mm) Through Hole"
CQ1 CQ2: library part "Cap 0402 22p", "Capacitor", Manufacturer=Yageo, Manufacturer code=CC0402KRNPO9BN220, Datasheet=https://www.yageo.com/upload/media/product/productsearch/datasheet/mlcc/UPY-GP_NP0_16V-to-50V_18.pdf, Distributor=Digi-key, Distributor code=311-3781-1-ND
D0: library part Diode, "DIODE GEN PURP 1KV 1A DO41", Manufacturer="ON Semiconductor", Manufacturer Part Number=UF4007, Datasheet link=https://www.onsemi.com/pub/Collateral/UF4007-D.pdf, Detailed Description="Diode Standard 1000V 1A Through Hole DO-204AL (DO-41)", Digi-Key Part Number=UF4007TR-ND
IC1 IC2 IC3: library part IC2, "LM7812ACT, 1A", Manufacturer_Name="ON Semiconductor", Manufacturer_Part_Number=LM7812ACT, RS Part Number=8062839, Datasheet link=https://componentsearchengine.com/Datasheets/2/LM7805ACT.pdf, Mouser Part Number=512-LM7812ACT, Mouser Price/Stock=https://www.mouser.com/Search/Refine.aspx?Keyword=512-LM7805ACT, RS Price/Stock=http://uk.rs-online.com/web/p/products/8062839
IC4: library part IC1, "LM7805ACT, 1A", Manufacturer_Name="ON Semiconductor", Mouser Part Number=512-LM7805ACT, RS Part Number=8062839, Datasheet link=https://componentsearchengine.com/Datasheets/2/LM7805ACT.pdf, Height=4.7mm, Manufacturer_Part_Number=LM7805ACT, Mouser Price/Stock=https://www.mouser.com/Search/Refine.aspx?Keyword=512-LM7805ACT, RS Price/Stock=http://uk.rs-online.com/web/p/products/8062839
IC5 IC6 IC7 IC8 IC10 IC11: library part IC3, "OPTOISO, 600mA, 10V ~ 30V", Manufacturer="Toshiba Semiconductor and Storage", Datasheet link=https://eu.mouser.com/datasheet/2/408/TLP701H_datasheet_en_20151223-1135480.pdf, Detailed Description="Logic Output Optoisolator  Push-Pull, Totem Pole 5000Vrms 1 Channel 20kV/µs CMTI 6-SO", Manufacturer Part Number=TLP701H(TP,F)
IC9: library part IC4, Manufacturer_Name=Microchip, Mouser Part Number=579-30F4011-30I/P, RS Part Number=6229954P, Allied_Number=70045352, Allied Price/Stock=https://www.alliedelec.com/microchiptechnologyinc-dspic30f4011-30i-p/70045352/, Datasheet link=https://componentsearchengine.com/Datasheets/5/DSPIC30F4011-30I_P.pdf, Height=6.35mm, Manufacturer_Part_Number=DSPIC30F4011-30I/P, Mouser Price/Stock=https://www.mouser.com/Search/Refine.aspx?Keyword=579-30F4011-30I%2FP, RS Price/Stock=http://uk.rs-online.com/web/p/products/6229954P
IC12: library part TLC27M4AIN, "Integrated Circuit", Manufacturer_Name="Texas Instruments", Mouser Part Number=595-TLC27M4AIN, Arrow Part Number=TLC27M4AIN, Datasheet link=http://www.ti.com/lit/gpn/tlc27m4a, Manufacturer_Part_Number=TLC27M4AIN, Mouser Price/Stock=https://www.mouser.com/Search/Refine.aspx?Keyword=595-TLC27M4AIN
P3 P4: "Connector, 2 pin", Digi-Key Part Number=A98076-ND, Manufacturer="TE Connectivity AMP Connectors", Manufacturer Part Number=282836-2, Datasheet link=https://www.te.com/commerce/DocumentDelivery/DDEController?Action=srchrtrv&DocNm=1308389_EUROSTYLE_TERMINAL_BLOCKS&DocType=CS&DocLang=English, Detailed Description="2 Position Wire to Board Terminal Block Horizontal with Board 0.197\" (5.00mm) Through Hole"
P5: library part "Header 6", "MPLAB connector", Digi-Key Part Number=A31422-ND, Manufacturer="TE Connectivity AMP Connectors", Manufacturer Part Number=5555165-1, Datasheets=https://www.te.com/commerce/DocumentDelivery/DDEController?Action=srchrtrv&DocNm=5555165&DocType=Customer+Drawing&DocLang=English, Detailed Description="Jack Modular Connector 6p6c (RJ11, RJ12, RJ14, RJ25) 90° Angle (Right) Unshielded Cat3"
Q1: library part "Crystal oscillator", "CRYSTAL 7.3728MHZ 18PF T/H", Manufacturer="ECS Inc.", Manufacturer code=ECS-73-18-4XEN, Datasheet=https://ecsxtal.com/store/pdf/hc-49usx.pdf, Distributor=Digi-Key, Distributor code=XC1740-ND
Q1 Q2 Q3 Q4 Q5 Q6 Q7 Q8 Q9 Q10 Q11: library part MOSFET, "MOSFET (N-Channel)", Manufacturer_Name=STMicroelectronics, Mouser Part Number=511-STP7NK40ZFP, RS Part Number=8107418, Allied_Number=70547873, Allied Price/Stock=http://www.alliedelec.com/stmicroelectronics-stp7nk40zfp/70547873/, Datasheet link=http://www.st.com/web/en/resource/technical/document/datasheet/CD00003040.pdf, Height=4.6mm, Manufacturer_Part_Number=STP7NK40ZFP, Mouser Price/Stock=https://www.mouser.com/Search/Refine.aspx?Keyword=511-STP7NK40ZFP, RS Price/Stock=https://uk.rs-online.com/web/p/products/8107418
R0: library part Res5, "140 Ohm, 0.25W", Manufacturer=Yageo, Manufacturer Part Number=MFR-25FBF52-140R, Datasheet link=https://www.yageo.com/upload/media/product/products/datasheet/lr/Yageo_LR_CFR_1.pdf, Detailed Description="1 kOhms ±5% 0.25W, 1/4W Through Hole Resistor Axial  Carbon Film", Digi-Key Part Number=140XBK-ND
R1 R3: library part Res2, "2K4, 0.25W"
R2: library part Res1, "240 Ohm, 0.25W", Manufacturer=Yageo, Manufacturer Part Number=CFR-25JB-52-270R, Datasheet link=https://www.yageo.com/upload/media/product/products/datasheet/lr/Yageo_LR_CFR_1.pdf, Detailed Description="240 Ohms ±5% 0.25W, 1/4W Through Hole Resistor Axial  Carbon Film", Digi-Key Part Number=270QBK-ND
R4 R5 R6 R7 R9 R24 R25 R26 R27 R28 R29: library part Res3, "47 Ohm, 0.25W", Manufacturer=Yageo, Manufacturer Part Number=CFR-25JB-52-47R, Datasheet link=https://www.yageo.com/upload/media/product/products/datasheet/lr/Yageo_LR_CFR_1.pdf, Detailed Description="47 Ohms ±5% 0.25W, 1/4W Through Hole Resistor Axial  Carbon Film", Digi-Key Part Number=47QBK-ND
R8: library part Res7, "47 KOhm, 0.25W", Manufacturer=Yageo, Manufacturer Part Number=CFR-25JR-52-47K, Datasheet link=https://www.yageo.com/upload/media/product/products/datasheet/lr/Yageo_LR_CFR_1.pdf, Detailed Description="47 kOhms ±5% 0.25W, 1/4W Through Hole Resistor Axial  Carbon Film", Digi-Key Part Number=47KQTR-ND
R10: library part Res3, "RES 470 OHM 1/4W 5% AXIAL", Manufacturer=Yageo, Manufacturer Part Number=CFR-25JR-52-470R, Datasheet link=https://www.yageo.com/upload/media/product/products/datasheet/lr/Yageo_LR_CFR_1.pdf, Detailed Description="470 Ohms ±5% 0.25W, 1/4W Through Hole Resistor Axial Carbon Film", Digi-Key Part Number=470QTR-ND
R11: library part Res6, "3K3 Ohm, 0.25W", Digi-Key Part Number=13-CFR-25JR-52-3K3CT-ND, Manufacturer=Yageo, Detailed Description="3.3 kOhms ±5% 0.25W, 1/4W Through Hole Resistor Axial  Carbon Film", Manufacturer Part Number=CFR-25JR-52-3K3
R12 R13 R14 R15 R16 R17: library part Res4, "10K, 0,25W", Manufacturer_Name="YAGEO (PHYCOMP)", Mouser Part Number=603-CFR-25JR-5210K, Arrow Part Number=CFR-25JR-52-10K, Arrow Price/Stock=https://www.arrow.com/en/products/cfr-25jr-52-10k/yageo, Datasheet link=https://componentsearchengine.com/Datasheets/1/CFR-25JR-52-10K.pdf, Manufacturer_Part_Number=CFR-25JR-52-10K, Mouser Price/Stock=https://www.mouser.com/Search/Refine.aspx?Keyword=603-CFR-25JR-5210K
R22: library part Res2, "RES 24K OHM 1/4W 5% AXIAL", Manufacturer=Yageo, Manufacturer Part Number="Number  CFR-25JB-52-24K", Datasheets=https://www.yageo.com/upload/media/product/products/datasheet/lr/Yageo_LR_CFR_1.pdf, Digi-Key Part Number=24KQBK-ND
R23: library part Res1, "RES 2.4K OHM 1/4W 5% AXIAL", Manufacturer=Yageo, Manufacturer Part Number=CFR-25JB-52-2K4, Datasheet link=https://www.yageo.com/upload/media/product/products/datasheet/lr/Yageo_LR_CFR_1.pdf, Detailed Description="2.4 kOhms ±5% 0.25W, 1/4W Through Hole Resistor Axial Carbon Film", Digi-Key Part Number=2.4KQBK-ND
T1: "SCR, 400V, 8A", Digi-Key Part Number=497-4480-5-ND, Manufacturer=STMicroelectronics, Manufacturer Part Number=TXN408GRG, Datasheets=https://media.digikey.com/pdf/Data%20Sheets/ST%20Microelectronics%20PDFS/TXN,TYN%20058-1008%20G.pdf, Detailed Description="SCR 400V 8A Standard Recovery Through Hole TO-220AB"
VR1 VR2: "Variable Resistor", Manufacturer="CTS Electrocomponents", Manufacturer code=296UD103B1N, Datasheet=https://www.ctscorp.com/wp-content/uploads/296.pdf, Distributor=Digi-Key, Ordering Code=CT2265-ND
ZD1 ZD2 ZD3 ZD4 ZD5 ZD6 ZD7: library part "Zener Diode", "12V, 200mA, 500mW", Manufacturer="Vishay Semiconductor Diodes Division", Manufacturer Part Number=BZX55C12-TAP, Datasheets=http://www.vishay.com/docs/85604/bzx55.pdf, Detailed Description="Zener Diode 12V 500mW  Through Hole DO-35", Digi-Key Part Number=BZX55C12-TAPGICT-ND

## Via types
v1: diameter 1.27, hole 0.711, Energetika to Napajanje 2, 12 vias
v2: diameter 1.27, hole 0.711, Energetika to Mikroprocesor, 9 vias
v3: diameter 1.27, hole 0.711, Energetika to Zemlja, 2 vias

## Nets (pads, with @x,y where several pads share a name; then routed paths per layer and width w, separated by ;. In a path a pad name is that pad's centre, name@x,y a point inside that pad or via, vN(x,y) a via of type N, cw(c..) or ccw(c..) an arc to the next point about the centre after c; other vN are vias at no path point)
12VN: BR_TIR.2 CIN1.4 | length 22
  Zemlja w1: CIN1.4 31.623,112.649 45.605,112.649 BR_TIR.2
12VP: BR_TIR.4 CIN1.3 | length 28.8
  Energetika w1: CIN1.3@30.226,115.951 31.369,114.808 39.751,114.808 43.434,118.491 48.641,118.491 52.578,122.428 BR_TIR.4
20VN: BR_NAP.2 CIN1.2 | length 10.1
  Zemlja w1: CIN1.2 34.302,116.828 BR_NAP.2
20VN1: BR_TRAN1.2 CIN2.2 | length 8.9
  Zemlja w1: CIN2.2 31.496,96.901 BR_TRAN1.2
20VN2: BR_TRAN2.2 CIN2.4 | length 7.3
  Zemlja w1: CIN2.4 35.306,89.281 BR_TRAN2.2
20VN3: BR_TRAN34.2 CIN2.6 | length 8
  Zemlja w1: CIN2.6 33.123,81.661 BR_TRAN34.2
20VND: BR_DSP.2 CIN2.8 | length 10.2
  Zemlja w1: CIN2.8 36.449,67.183 BR_DSP.2
20VP: BR_NAP.4 CIN1.1 | length 15.5
  Energetika w1: CIN1.1 40.478,126.031 BR_NAP.4
20VP1: BR_TRAN1.4 CIN2.1 | length 17.7
  Napajanje 2 w1: CIN2.1 29.591,102.763 35.804,108.976 40.503,108.976 BR_TRAN1.4
20VP2: BR_TRAN2.4 CIN2.3 | length 14.9
  Napajanje 2 w1: CIN2.3 34.046,97.546 40.503,97.546 BR_TRAN2.4
20VP3: BR_TRAN34.4 CIN2.5 | length 13.1
  Napajanje 2 w1: CIN2.5 29.591,85.608 40.376,85.608 BR_TRAN34.4
20VPD: BR_DSP.4 CIN2.7 | length 14.8
  Mikroprocesor w1: CIN2.7 33.028,77.851 38.616,72.263 BR_DSP.4
26V: BR_NAP.1 R0.2 T1.2 | length 36.2
  Energetika w1: BR_NAP.1 40.015,120.894 44.821,120.894 47.244,123.317 47.244,123.571 50.546,126.873 59.69,126.873 R0.2 64.77,121.793 64.77,117.315 T1.2
26V1: BR_TRAN1.1 CE2.1 IC1.1 | length 29.3
  Napajanje 2 w1: BR_TRAN1.1 37.971,105.908 50.79,105.908 CE2.1@50.8,105.918 ; CE2.1 54.102,105.791 56.388,108.077 IC1.1@64.516,108.077
26V2: BR_TRAN2.1 CE4.1 IC2.1 | length 29.8
  Napajanje 2 w1: BR_TRAN2.1 37.971,94.478 CE4.1@51.592,94.478 ; CE4.1 54.102,94.361 56.261,96.52 IC2.1
26V34: BR_TRAN34.1 CE6.1 IC3.1 | length 30
  Napajanje 2 w1: BR_TRAN34.1 38.088,82.296 CE6.1 53.721,82.296 56.261,84.836 IC3.1
26VD: BR_DSP.1 CE8.1 IC4.1 | length 29.4
  Mikroprocesor w1: BR_DSP.1 37.983,70.729 CE8.1@51.044,70.729 ; CE8.1 53.594,72.898 63.627,72.898 IC4.1 IC4.1@64.516,73.279
GND: BR_NAP.3 BR_TRAN34.3 C7.1 C12.1 C13.1 C16.2 C17.2 C18.1 C19.2 CE1.2 CE6.2 CE7.2 CE12.2 CE13.2 CE14.2 IC3.2 IC7.4 IC8.4 IC10.4 Q3.3 Q4.3 Q5.3 R2.1 | length 584.4
  Zemlja w0.254: 168.656,86.781 168.87,86.995 ; 188.047,87.028 188.087,86.988
  Zemlja w1: BR_TRAN34.3 50.379,78.486 CE6.2 52.872,79.796 52.959,79.883 64.262,79.883 67.051,82.672 IC3.2 ; BR_NAP.3 45.591,118.362 51.318,118.362 56.142,113.538 70.358,113.538 74.549,117.729 CE1.2 80.137,117.729 ; 64.135,79.756 77.938,79.756 CE7.2 85.471,80.304 C7.1 91.908,81.066 100.727,72.247 100.727,64.718 103.834,61.611 133.493,61.611 136.398,64.516 ; Q5.3 106.404,114.534 102.193,118.745 102.108,118.745 102.108,124.587 99.992,126.703 95.563,126.703 R2.1 94.64,126.263 86.106,117.729 80.137,117.729 ; IC7.4 149.86,88.178 150.074,88.392 ; CE12.2 153.289,100.203 150.074,96.988 C16.2 150.074,88.392 ; IC8.4 168.656,86.781 ; 168.87,86.995 168.87,88.9 ; 188.047,87.028 188.047,89.027 ; IC10.4 188.087,86.988 ; CE14.2 192.024,101.346 188.047,97.369 C19.2 188.047,89.027 ; 80.137,117.729 84.328,113.538 101.854,113.538 104.394,110.998 121.539,110.998 132.928,122.387 136.23,122.387 138.027,124.184 Q3.3 138.027,125.752 135.763,128.016 163.068,128.016 164.612,126.472 Q4.3 164.612,120.376 172.466,112.522 CE13.2 172.466,101.43 168.87,97.834 C17.2 168.87,88.9 ; 136.398,64.516 136.398,88.392 137.541,89.535 C12.1 139.319,89.535 140.716,90.932 147.534,90.932 150.074,88.392 ; 136.398,64.516 138.811,62.103 154.178,62.103 ; 154.178,62.103 173.101,62.103 175.387,64.389 175.387,88.519 176.403,89.535 C18.1 177.967,89.575 179.451,91.059 186.015,91.059 188.047,89.027 ; 154.178,62.103 156.591,64.516 156.591,88.265 157.734,89.408 C13.1 159.512,89.408 161.036,90.932 166.838,90.932 168.87,88.9
MOT+: BR_TRAN1.3 C3.1 C10.1 C14.2 CE2.2 CE3.2 CE10.2 IC1.2 IC5.4 | length 119
  Zemlja w0.254: 110.323,87.249 110.363,87.209
  Zemlja w1: BR_TRAN1.3 49.998,101.854 49.998,102.108 CE2.2 52.705,103.291 52.745,103.251 64.389,103.251 66.802,105.664 IC1.2 ; 64.135,102.997 78.319,102.997 CE3.2 84.836,103.545 C3.1 86.447,104.942 98.679,92.71 98.679,92.496 ; C10.1 98.679,92.496 ; 110.323,87.249 110.323,89.321 ; IC5.4 110.363,87.209 ; CE10.2 113.236,99.901 110.323,96.988 C14.2 110.323,89.321 ; 98.679,92.496 99.989,91.186 108.458,91.186 110.323,89.321
MOT-: BR_TRAN2.3 C5.1 C11.1 C15.2 CE4.2 CE5.2 CE11.2 IC2.2 IC6.4 | length 180.2
  Zemlja w0.254: 78.74,92.672 78.778,92.71
  Zemlja w1: BR_TRAN2.3 50.038,90.424 50.038,90.464 CE4.2 52.491,91.861 52.578,91.948 64.643,91.948 ; IC2.2 67.051,94.356 64.643,91.948 ; C11.1@119.806,89.49 C11.1 ; IC6.4@130.81,71.755 131.024,71.969 131.024,87.289 ; 131.191,87.122 131.024,87.289 ; CE11.2 133.604,99.568 131.024,96.988 C15.2 131.024,87.289 ; 64.643,91.948 78.7,91.948 CE5.2 85.511,91.988 C5.1 93.218,92.71 101.981,83.947 101.981,65.238 104.354,62.865 115.062,62.865 117.221,65.024 117.221,88.392 118.364,89.535 C11.1 ; C11.1 120.878,89.535 120.878,90.108 121.688,90.918 122.834,90.918 123.201,90.551 127.745,90.551 127.745,90.568 131.024,87.289
NetACS712_1: ACS712.1 ACS712.2 P3.2 | length 37.7
  Energetika w1: P3.2 181.864,124.333 183.896,126.365 214.167,126.365 ACS712.1 ACS712.2
NetACS712_3: ACS712.3 ACS712.4 Q1.3 Q3.2 | length 103.8
  Energetika w1: Q1.3 128.925,120.142 139.518,120.142 ; Q3.2 135.477,124.184 139.518,120.142 ; ACS712.3 ACS712.4 183.814,124.378 172.72,113.284 164.211,113.284 157.353,120.142 139.518,120.142
NetACS712_6: ACS712.6 IC12.12 | length 206.9
  Energetika w0.5: IC12.12 84.467,63.258 87.157,63.258 92.86,68.961 214.376,68.961 221.996,76.581 221.996,100.711 216.916,105.791 216.916,109.728 210.439,116.205 210.439,120.65 211.201,121.412 212.725,121.412 213.614,120.523 213.614,118.954
NetACS712_7: ACS712.7 C23.1 | length 8.7
  Energetika w0.5: 214.884,118.954 214.884,117.475 218.91,113.449 C23.1
NetBR_TIR_1: BR_TIR.1 ZD6.1 | length 157.6
  Mikroprocesor w1: BR_TIR.1 52.316,122.428 53.85,120.894 54.874,120.894 61.976,113.792 100.965,113.792 106.299,108.458 194.978,108.458 ZD6.1
NetC3_2: C3.2 CE3.1 IC1.3 ZD1.1 | length 34.7
  Napajanje 2 w1: IC1.3 76.962,107.95 CE3.1 84.836,106.045 C3.2 98.044,107.442 ZD1.1
NetC5_2: C5.2 CE5.1 IC2.3 ZD2.1 | length 113.7
  Napajanje 2 w1: IC2.3 76.708,96.52 CE5.1 85.511,94.488 C5.2 88.432,95.21 101.981,81.661 101.981,64.604 103.974,62.611 113.919,62.611 116.459,65.151 116.459,90.424 119.761,93.726 119.761,101.854 ZD2.1
NetC7_2: C7.2 CE7.1 IC3.3 ZD3.1 ZD4.1 ZD5.1 | length 255.1
  Energetika w1: C7.2@86.204,83.537 C7.2
  Napajanje 2 w0.254: 135.89,64.389 135.89,64.516
  Napajanje 2 w1: IC3.3 76.454,84.836 CE7.1 85.471,82.804 C7.2 96.012,83.566 99.949,79.629 99.949,64.008 102.997,60.96 132.334,60.96 135.89,64.516 135.89,90.297 139.827,94.234 139.827,101.854 141.351,103.378 ZD3.1 ; 135.89,64.389 137.922,62.357 153.797,62.357 155.956,64.516 ; ZD4.1 161.544,103.124 159.893,101.473 159.893,94.615 155.956,90.678 155.956,64.516 ; ZD5.1 178.783,102.362 178.783,94.709 174.625,90.551 174.625,64.516 172.466,62.357 158.115,62.357 155.956,64.516
NetC10_2: C10.2 CE10.1 IC5.6 ZD1.2 | length 42.2
  Napajanje 2 w1: ZD1.2 101.179,94.473 101.179,90.511 ; v1(105.283,71.882) 105.283,81.661 101.179,85.765 C10.2 101.179,90.511 ; CE10.1 110.236,99.568 101.179,90.511
NetC11_2: C11.2 CE11.1 IC6.6 ZD2.2 | length 41.5
  Napajanje 2 w0.254: C11.2@121.92,89.876 C11.2
  Napajanje 2 w1: C11.2@121.92,89.876 121.92,90.884 ; ZD2.2 121.92,90.884 ; C11.2 122.261,82.59 125.984,78.867 v1(125.984,71.755) ; CE11.1 130.604,99.568 121.92,90.884
NetC12_2: C12.2 CE12.1 IC7.6 ZD3.2 | length 41.6
  Napajanje 2 w0.254: C12.2@141.351,89.622 C12.2 ; IC7.6@144.613,71.795 v1(144.78,71.628)
  Napajanje 2 w1: C12.2@141.351,89.622 141.351,90.63 ; ZD3.2 141.351,90.63 ; C12.2 144.613,86.36 IC7.6@144.613,71.795 ; CE12.1 150.289,99.568 141.351,90.63
NetC13_2: C13.2 CE13.1 IC8.6 ZD4.2 | length 39.7
  Napajanje 2 w1: ZD4.2 161.544,92.456 ; v1(163.576,71.628) 163.576,87.376 C13.2 161.544,92.456 ; CE13.1 169.466,100.203 161.719,92.456 161.544,92.456
NetC14_1: C14.1 Q1.1@119.634,124.333 R4.1 | length 43.5
  Napajanje 2 w1: R4.1 107.834,89.524 107.823,89.535 C14.1 119.634,106.299 Q1.1@119.634,124.333
NetC15_1: C15.1 Q2.1 R5.1 | length 46
  Napajanje 2 w1: R5.1 128.535,89.422 128.524,89.433 C15.1 139.446,105.41 139.446,110.363 146.219,117.136 Q2.1
NetC16_1: C16.1 Q3.1 R6.1 | length 65.5
  Napajanje 2 w1: Q3.1@133.35,124.714 134.874,126.238 151.892,126.238 156.464,121.666 156.464,103.378 C16.1 147.574,89.306 147.585,89.295 R6.1
NetC17_1: C17.1 Q4.1 R7.1 | length 45.5
  Napajanje 2 w1: Q4.1 159.512,123.571 170.942,112.141 170.942,99.906 166.37,95.334 C17.1 166.37,85.464 R7.1
NetC18_2: C18.2 CE14.1 IC10.6 ZD5.2 | length 40.9
  Napajanje 2 w0.254: C18.2@180.34,89.662 C18.2
  Napajanje 2 w1: C18.2@180.34,89.662 180.34,91.567 ; ZD5.2 180.34,91.567 ; C18.2 183.007,86.995 v1(183.007,71.661) ; CE14.1 189.024,100.203 180.388,91.567 180.34,91.567
NetC19_1: C19.1 Q5.1 R9.1 | length 120.9
  Napajanje 2 w1: Q5.1 106.426,123.063 111.252,127.889 168.402,127.889 190.403,105.888 190.403,99.809 185.547,94.953 C19.1 R9.1@185.547,85.503
NetC20_2: C20.2 CE15.1 IC11.6 ZD6.2 | length 40.5
  Mikroprocesor w1: v2(205.994,71.407) 199.644,77.757 C20.2 ZD6.2 199.644,97.409 CE15.1
NetC21_2: C21.2 R10.1 R11.2 T1.3 ZD7.2 | length 195.7
  Mikroprocesor w1: T1.3 63.688,115.697 102.489,115.697 108.077,110.109 208.658,110.109 219.71,99.057 ZD7.2 ; R10.1 205.243,85.194 205.243,86.698 205.232,86.709 205.232,90.551 208.066,90.551 C21.2 216.774,90.638 ZD7.2 ; R11.2 ZD7.2
NetC24_1: C24.1 Q6.1 R24.1 | length 13.9
  Mikroprocesor w1: Q6.1 107.823,53.086 C24.1 113.538,47.371 R24.1
NetC25_1: C25.1 Q7.1 R25.1 | length 13.5
  Mikroprocesor w1: Q7.1 121.433,52.343 C25.1 126.331,47.445 R25.1
NetC26_1: C26.1 Q8.1 R26.1 | length 13.5
  Mikroprocesor w1: Q8.1 135.044,52.448 C26.1 R26.1
NetC27_1: C27.1 Q9.1 R27.1 | length 13.3
  Mikroprocesor w1: Q9.1 148.697,52.638 C27.1 154.051,47.284 R27.1
NetC28_1: C28.1 Q10.1 R28.1 | length 13.2
  Mikroprocesor w1: Q10.1 162.265,53.04 C28.1 R28.1
NetC29_1: C29.1 Q11.1 R29.1 | length 12.9
  Mikroprocesor w1: Q11.1 175.768,55.646 175.768,51.983 C29.1 180.179,47.504 R29.1
  Zemlja w1: C29.1@180.179,47.504 C29.1
NetCQ1_2: CQ1.2 IC9.13 Q1.2@42.799,50.446 | length 35.6
  Energetika w0.5: v1(47.752,50.546) CQ1.2@48.976,50.546
  Napajanje 2 w0.5: Q1.2@42.799,50.446 46.455,50.446 ; v1(47.752,50.546) 46.555,50.546 46.455,50.446 ; IC9.13 62.166,37.592 59.309,37.592 46.455,50.446
NetCQ2_2: CQ2.2 IC9.14 Q1.1@42.799,45.566 | length 31.3
  Energetika w0.5: v1(47.752,45.593) CQ2.2@48.976,45.593
  Napajanje 2 w0.5: Q1.1@42.799,45.566 46.128,45.566 ; v1(47.752,45.593) 46.155,45.593 46.128,45.566 ; IC9.14 62.293,34.925 56.769,34.925 46.128,45.566
NetD0_1: D0.1 Q5.2 R3.1 | length 17.5
  Energetika w1: R3.1 98.723,117.084 Q5.2 110.119,117.084 114.219,112.984 D0.1
NetIC5_3: IC5.3 Q6.2 | length 8.4
  Mikroprocesor w1: Q6.2@110.363,55.88 v2(110.363,64.262)
NetIC5_5: IC5.5 R4.2 | length 5.6
  Napajanje 2 w1: v1(107.823,71.882) 107.823,77.449 R4.2
NetIC6_3: IC6.3 Q7.2 | length 11.7
  Napajanje 2 w0.254: IC6.3@130.81,64.135 IC6.3@131.191,63.754
  Mikroprocesor w1: Q7.2 123.983,57.054 v2(131.064,64.135)
NetIC6_5: IC6.5 R5.2 | length 5.6
  Napajanje 2 w1: v1(128.524,71.755) 128.524,73.533 128.535,73.544 R5.2
NetIC7_3: IC7.3 Q8.2 | length 15.7
  Mikroprocesor w1: Q8.2@137.541,55.88 141.859,60.198 146.05,60.198 v2(149.86,64.008)
NetIC7_5: IC7.5 R6.2 | length 5.7
  Napajanje 2 w1: v1(147.32,71.628) 147.574,71.882 147.574,73.406 147.585,73.417 R6.2
NetIC8_3: IC8.3 Q9.2 | length 20.9
  Mikroprocesor w1: Q9.2@151.13,55.88 155.448,60.198 164.846,60.198 v2(168.656,64.008)
NetIC8_5: IC8.5 R7.2 | length 5.7
  Napajanje 2 w0.254: v1(166.116,71.628) IC8.5@166.37,71.882
  Napajanje 2 w1: IC8.5@166.37,71.882 166.37,73.406 166.381,73.417 R7.2
NetIC9_1: IC9.1 P5.1 R8.1 | length 93
  Mikroprocesor w0.5: R8.1 56.295,38.1 46.482,38.1 39.37,30.988 39.37,24.892 40.132,24.13 41.148,24.13 41.91,24.892 41.91,25.4 P5.1 45.847,29.337 95.567,29.337 97.916,31.686 IC9.1
NetIC9_4: IC9.4 IC12.14 R15.2 | length 38.2
  Napajanje 2 w0.5: IC12.14 81.915,61.595 R15.2 91.397,52.113 91.397,32.151 IC9.4
NetIC9_5: IC9.5 IC12.7 R13.1 | length 33
  Napajanje 2 w0.5: IC12.7 75.184,41.275 77.851,41.275 ; R13.1@81.645,45.074 81.645,43.926 80.518,42.799 79.375,42.799 77.851,41.275 ; IC9.5 88.392,36.195 83.312,41.275 77.851,41.275
NetIC9_6: IC9.6 IC12.1 R17.1 | length 48.8
  Energetika w1: IC12.1@69.977,61.722 IC12.1
  Napajanje 2 w0.5: R17.1 65.024,55.626 65.024,45.085 70.612,39.497 82.677,39.497 85.852,36.322 IC9.6 ; R17.1@67.437,58.05 67.437,60.579 68.453,61.595 IC12.1
NetIC9_25: IC9.25 P5.4 | length 22.9
  Mikroprocesor w0.5: P5.4 40.64,22.225 45.085,17.78 58.928,17.78 IC9.25
NetIC9_26: IC9.26 P5.5 | length 22
  Mikroprocesor w0.5: P5.5 45.847,18.923 60.325,18.923 IC9.26
NetIC9_33: IC9.33 R29.2 | length 119.2
  Mikroprocesor w1: IC9.33 88.138,8.89 101.976,8.89 108.331,15.245 108.331,20.474 109.886,22.029 109.886,33.945 111.025,35.084 116.355,35.084 119.53,38.259 131.35,38.259 132.874,39.783 145.061,39.783 146.426,41.148 157.861,41.148 159.258,42.545 169.672,42.545 R29.2
NetIC9_34: IC9.34 R28.2 | length 103
  Mikroprocesor w1: IC9.34 89.265,10.303 101.616,10.303 107.077,15.764 107.077,20.994 108.632,22.549 108.632,34.464 110.506,36.338 115.835,36.338 119.01,39.513 130.821,39.513 132.345,41.037 144.542,41.037 145.923,42.418 157.26,42.418 R28.2
NetIC9_35: IC9.35 R27.2 | length 85.6
  Mikroprocesor w1: IC9.35 90.551,11.557 101.097,11.557 105.823,16.283 105.823,21.513 107.378,23.068 107.378,34.988 109.982,37.592 115.316,37.592 118.491,40.767 130.302,40.767 131.826,42.291 143.544,42.291 R27.2
NetIC9_36: IC9.36 R26.2 | length 68.1
  Mikroprocesor w1: IC9.36 91.821,12.827 100.593,12.827 104.569,16.803 104.569,22.033 106.124,23.588 106.124,35.893 109.22,38.989 114.808,38.989 117.983,42.164 129.447,42.164 R26.2
NetIC9_37: IC9.37 R25.2 | length 51.1
  Mikroprocesor w1: IC9.37 93.107,14.081 100.074,14.081 103.315,17.322 103.315,22.552 104.87,24.107 104.87,36.703 108.68,40.513 114.173,40.513 R25.2
NetIC9_38: IC9.38 R24.2 | length 33
  Mikroprocesor w1: IC9.38 102.362,25.146 102.362,38.238 105.317,41.193 R24.2
NetIC10_3: IC10.3 Q10.2 | length 26.8
  Mikroprocesor w1: Q10.2 164.815,55.722 169.291,60.198 184.244,60.198 v2(188.087,64.041)
NetIC10_5: IC10.5 R9.2 | length 5.6
  Napajanje 2 w1: v1(185.547,71.661) R9.2@185.547,77.232
NetIC11_3: IC11.3 Q11.2 | length 36.2
  Mikroprocesor w1: Q11.2 178.425,56.124 181.245,58.944 206.231,58.944 v2(211.074,63.787)
NetIC11_5: IC11.5 R10.2 | length 7
  Mikroprocesor w1: R10.2 205.232,74.651 208.476,71.407 v2(208.534,71.407)
NetIC12_2: IC12.2 R16.1 R17.2 | length 32.7
  Napajanje 2 w0.5: R17.2@59.283,58.05 59.283,60.646 61.883,63.246 71.196,63.246 71.696,62.746 71.696,60.444 IC12.2@70.307,59.055 ; R16.1@67.453,49.287 67.453,51.607 66.421,52.64 66.421,55.372 IC12.2 IC12.2@70.104,58.801
  Napajanje 2 w1: IC12.2 IC12.2@70.307,59.055
NetIC12_3: IC12.3 R22.2 R23.2 | length 13.4
  Napajanje 2 w0.5: R23.2 67.403,47.337 68.707,48.641 68.707,52.279 67.564,53.422 67.564,53.975 69.85,56.261 IC12.3
NetIC12_5: IC12.5 R1.1 R2.2 | length 83.5
  Energetika w0.5: IC12.5 75.057,56.388 75.057,60.826 78.243,64.012 86.491,64.012 91.694,69.215 R1.1
  Energetika w1: R1.1 92.295,118.11 R2.2@95.123,118.11
NetIC12_6: IC12.6 R12.1 R13.2 | length 27.9
  Napajanje 2 w0.5: IC12.6 75.057,43.942 78.232,43.942 81.788,47.498 R12.1@81.788,49.138 ; R12.1@81.738,49.138 R12.1@81.788,49.138 ; R13.2 89.916,46.609 87.387,49.138 R12.1@81.788,49.138 ; R12.1@81.673,49.276 81.772,49.276 81.772,49.375 R12.1@81.673,49.276
NetIC12_13: IC12.13 R14.2 R15.1 | length 9
  Napajanje 2 w0.5: IC12.13 80.817,59.055 R14.2@81.822,58.05 ; R15.1 R14.2@81.788,57.99
NetP3_1: P3.1 Q2.3 Q4.2 | length 41.4
  Energetika w1: Q2.3 153.732,121.793 158.389,121.793 162.052,118.13 ; Q4.2 162.052,124.323 162.052,118.13 ; 164.638,115.189 162.052,117.775 162.052,118.13 ; 164.765,115.316 164.892,115.189 171.45,115.189 176.657,120.396 P3.1@176.657,124.206
NetP4_1: P4.1 R22.1 | length 33.3
  Napajanje 2 w0.5: P4.1 31.75,58.293 56.515,58.293 59.309,55.499 R22.1
NetP4_2: P4.2 R16.2 R23.1 | length 36.9
  Napajanje 2 w0.5: P4.2 30.941,54.102 56.515,54.102 58.327,52.29 58.327,52.197 59.089,51.435 R23.1@59.089,45.212
NetR12_2: R12.2
TK: BR_TIR.3 C20.1 C21.1 CE1.1 CE15.2 D0.2 IC11.4 Q1.2@122.184,124.333 Q2.2 R0.1 R1.2 R3.2 R11.1 T1.1 ZD7.1 | length 310.4
  Energetika w1: BR_TIR.3 56.906,118.374 58.792,118.374 61.387,115.779 65.958,115.779 67.437,117.258 T1.1 67.437,124.333 69.078,125.701 70.485,126.873 71.516,126.873 CE1.1 80.851,120.729 84.074,123.952 87.249,123.952 91.313,128.016 ; 91.567,128.053 94.017,128.053 ; R1.2 94.017,128.053 ; R3.2 101.219,127.889 101.219,128.053 ; D0.2 109.818,128.053 ; 120.65,128.016 122.184,126.482 Q1.2@122.184,124.333 ; Q2.2 148.769,125.73 146.446,128.053 109.818,128.053 ; IC11.4 211.074,75.565 ; ZD7.1 211.201,75.565 211.074,75.565 ; 94.017,128.053 101.219,128.053 ; 101.219,128.053 106.262,128.053 ; 106.262,128.053 115.753,118.562 115.808,118.618 156.464,118.618 163.449,111.633 173.609,111.633 183.515,121.539 199.009,121.539 211.026,109.522 CE15.2 211.026,98.417 C20.1 203.541,88.138 C21.1 211.074,85.217 211.074,75.565 ; 106.262,128.053 109.818,128.053
VCC: ACS712.5 C9.2 C22.1 CE9.1 IC4.3 IC5.1 IC6.1 IC7.1 IC8.1 IC9.11 IC9.20 IC9.32 IC9.40 IC10.1 IC11.1 IC12.4 P5.2 R8.2 VR1.1 VR2.1 | length 628.4
  Energetika w0.5: IC12.4@69.85,53.975 IC12.4 IC12.4@70.485,53.975 ; 212.344,118.954 212.344,116.142 C22.1@218.885,109.601 ; v2(218.948,106.045) C22.1@218.948,109.538
  Energetika w1: C9.2@86.213,71.902 C9.2 ; C22.1@218.885,109.601 C22.1@218.948,109.538
  Napajanje 2 w0.254: C9.2@86.213,71.902 C9.2
  Mikroprocesor w0.5: P5.2 40.64,30.48 46.831,36.671 63.087,36.671 R8.2 68.512,42.096 68.512,52.637 IC12.4@69.85,53.975 ; IC9.20 51.625,30.353 71.819,30.353 IC9.11 74.295,32.829 74.295,64.77 ; IC12.4@70.485,53.975 73.533,57.023 73.533,64.008 74.295,64.77 ; 90.17,68.199 89.736,67.765 77.891,67.765 77.838,67.818 77.343,67.818 74.295,64.77 ; 201.582,68.199 212.598,68.199 214.249,69.85 221.361,76.962 221.361,100.076 218.948,102.489 v2(218.948,106.045)
  Mikroprocesor w1: IC4.3 76.474,73.279 CE9.1 85.745,71.394 C9.2 ; IC9.32 79.426,16.256 79.426,16.814 80.214,17.602 92.849,17.602 101.108,25.861 101.108,38.758 104.063,41.713 104.063,43.662 103.963,43.762 103.963,57.962 93.726,68.199 ; C9.2@86.213,71.902 86.467,71.902 90.17,68.199 93.726,68.199 ; IC9.40 100.475,16.256 102.061,17.842 102.061,23.072 103.616,24.627 103.616,37.719 108.061,42.164 113.538,42.164 117.221,45.847 117.221,65.151 114.173,68.199 ; IC5.1 105.283,68.199 ; IC6.1@125.73,64.135 121.666,68.199 ; VR2.1@133.167,25.142 VR2.1 136.973,21.336 153.191,21.336 VR1.1 156.635,34.461 163.322,41.148 180.594,41.148 188.595,49.149 200.406,49.149 214.249,62.992 214.249,69.85 ; IC7.1 140.589,68.199 ; IC8.1 159.385,68.199 ; 179.103,68.199 201.549,68.199 ; IC10.1 178.849,68.199 159.385,68.199 ; 201.582,68.199 IC11.1 ; 93.726,68.199 105.283,68.199 ; 105.283,68.199 114.173,68.199 ; 114.173,68.199 121.666,68.199 ; 121.666,68.199 140.589,68.199 ; 140.589,68.199 159.385,68.199
VP1: IC9.7 VR1.2 | length 72.4
  Napajanje 2 w0.5: IC9.7 85.55,29.448 148.217,29.448 VR1.2
VP2: IC9.8 VR2.2 | length 52.7
  Napajanje 2 w0.5: IC9.8 81.966,31.686 81.966,30.302 84.074,28.194 126.365,28.194 VR2.2
VSS: ACS712.8 BR_DSP.3 C9.1 C22.2 C23.2 C24.2 C25.2 C26.2 C27.2 C28.2 C29.2 CE8.2 CE9.2 CQ1.1 CQ2.1 IC4.2 IC9.12 IC9.21 IC9.31 IC9.39 IC12.11 P5.3 Q6.3 Q7.3 Q8.3 Q9.3 Q10.3 Q11.3 R14.1 VR1.3 VR2.3 | length 632.3
  Energetika w0.5: CQ2.1@49.98,45.466 CQ2.1 CQ1.1 ; CQ1.1@50.084,50.546 v3(52.324,50.546) ; 216.154,118.954 216.154,117.475 220.51,113.119 C23.2 C22.2 v3(220.51,106.172)
  Zemlja w0.5: P5.3 62.484,24.13 69.418,31.064 69.418,32.7 73.279,36.561 73.279,60.833 78.486,66.04 92.235,66.04 ; IC9.21 51.638,14.91 63.55,14.91 64.135,15.495 64.135,16.891 71.755,24.511 71.806,24.511 ; v3(52.324,50.546) 53.721,51.943 53.721,62.484 58.039,66.802 91.473,66.802 ; IC9.12 71.755,32.829 ; IC9.31 71.806,20.142 71.806,24.511 ; IC12.11 74.168,57.531 ; 92.964,65.405 92.87,65.405 92.616,65.151 78.994,65.151 74.168,60.325 74.168,57.531 ; 177.673,50.038 C29.2 199.275,50.038 221.383,72.178 221.361,102.999 220.51,103.849 v3(220.51,106.172) ; 71.755,32.829 71.806,32.778 71.806,24.511 ; 71.755,32.829 74.168,35.242 74.168,57.531